# Altium PCB PCB_Project_SFS_V3.PcbDoc
Units mm, origin at the board's own origin, x right, y up, seen from the top; angles counter-clockwise.
Board outline 13.5 x 13.5 mm, 6 copper layers (Top Layer, Mid-Layer 1, Ground Plane, Power Plane, Mid-Layer 2, Bottom Layer), stack 0.761 mm thick; 40 components, 67 nets, 179 pads, 48 vias.
Unrouted connection lines stored in the file: 1.
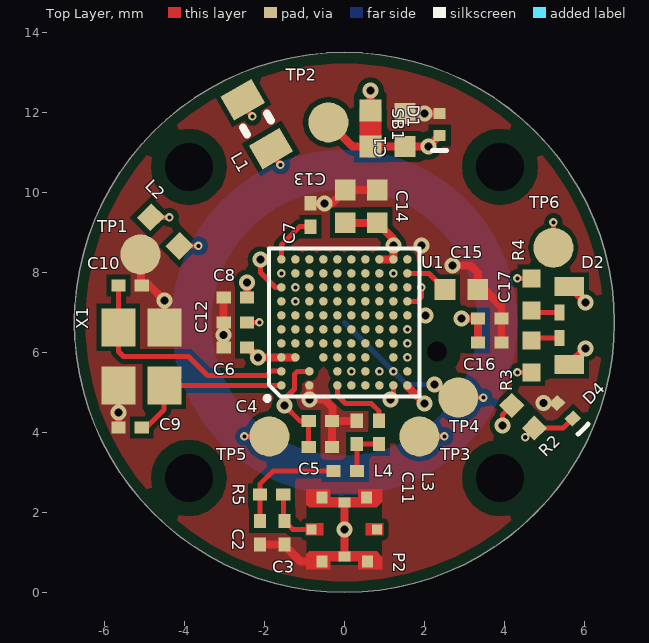
[diagram p0: Top Layer view]
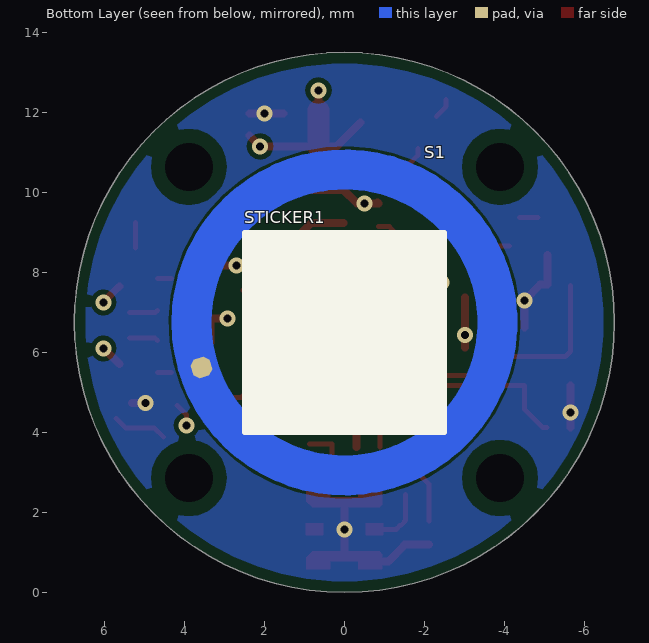
[diagram p1: Bottom Layer view, seen from below]
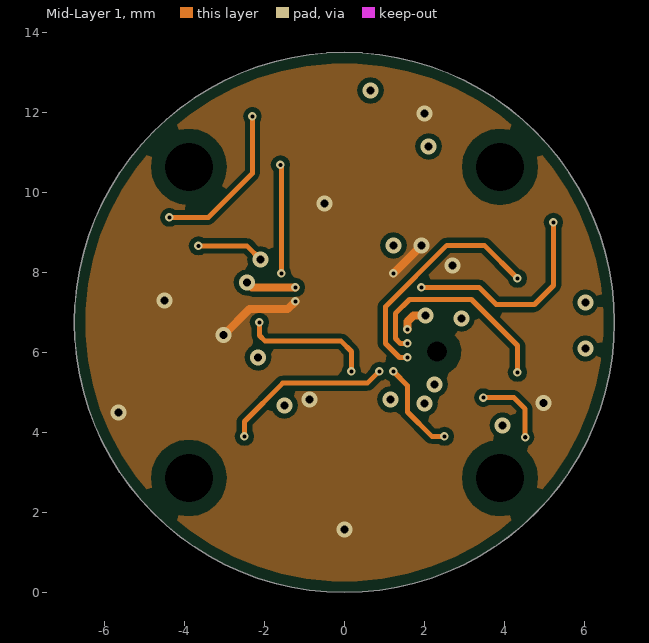
[diagram p2: Mid-Layer 1]
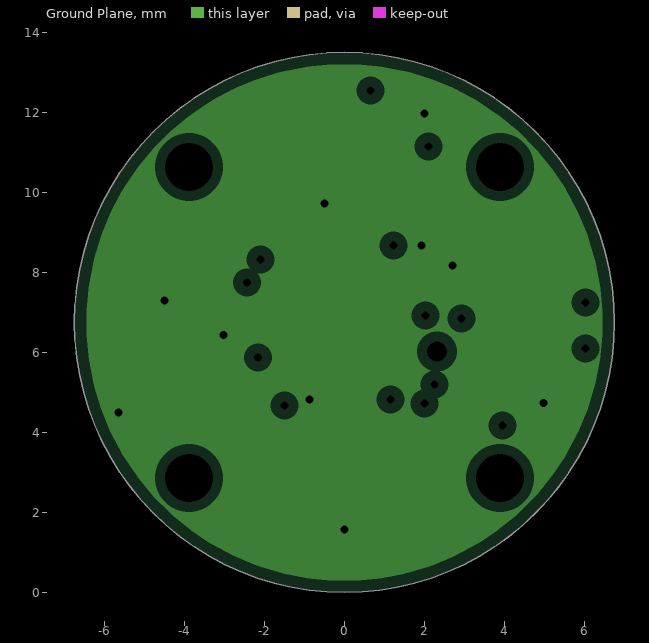
[diagram p3: Ground Plane, clearances drawn from the general rule]
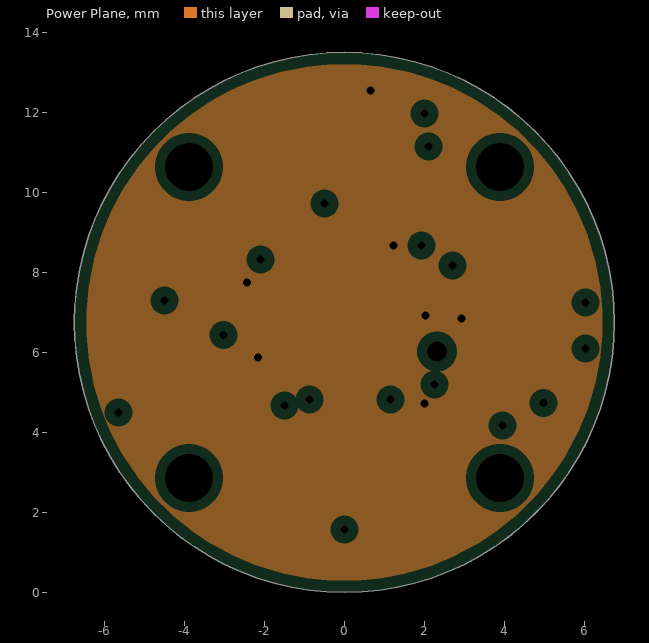
[diagram p4: Power Plane, clearances drawn from the general rule]
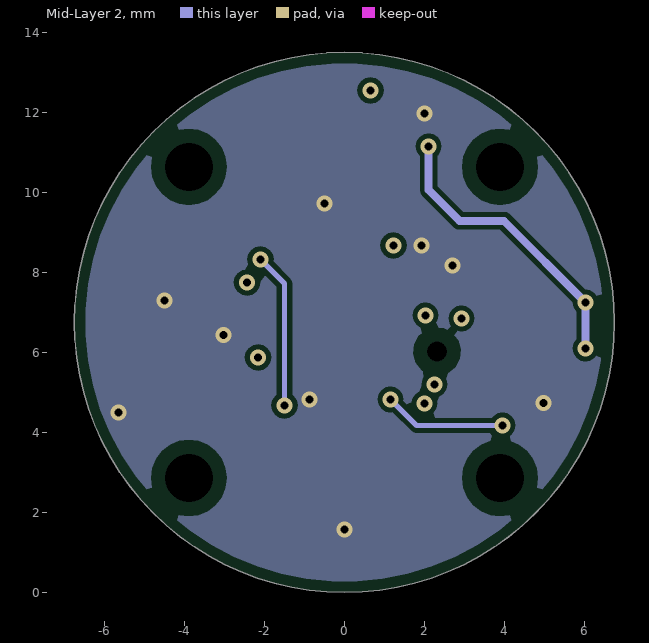
[diagram p5: Mid-Layer 2]
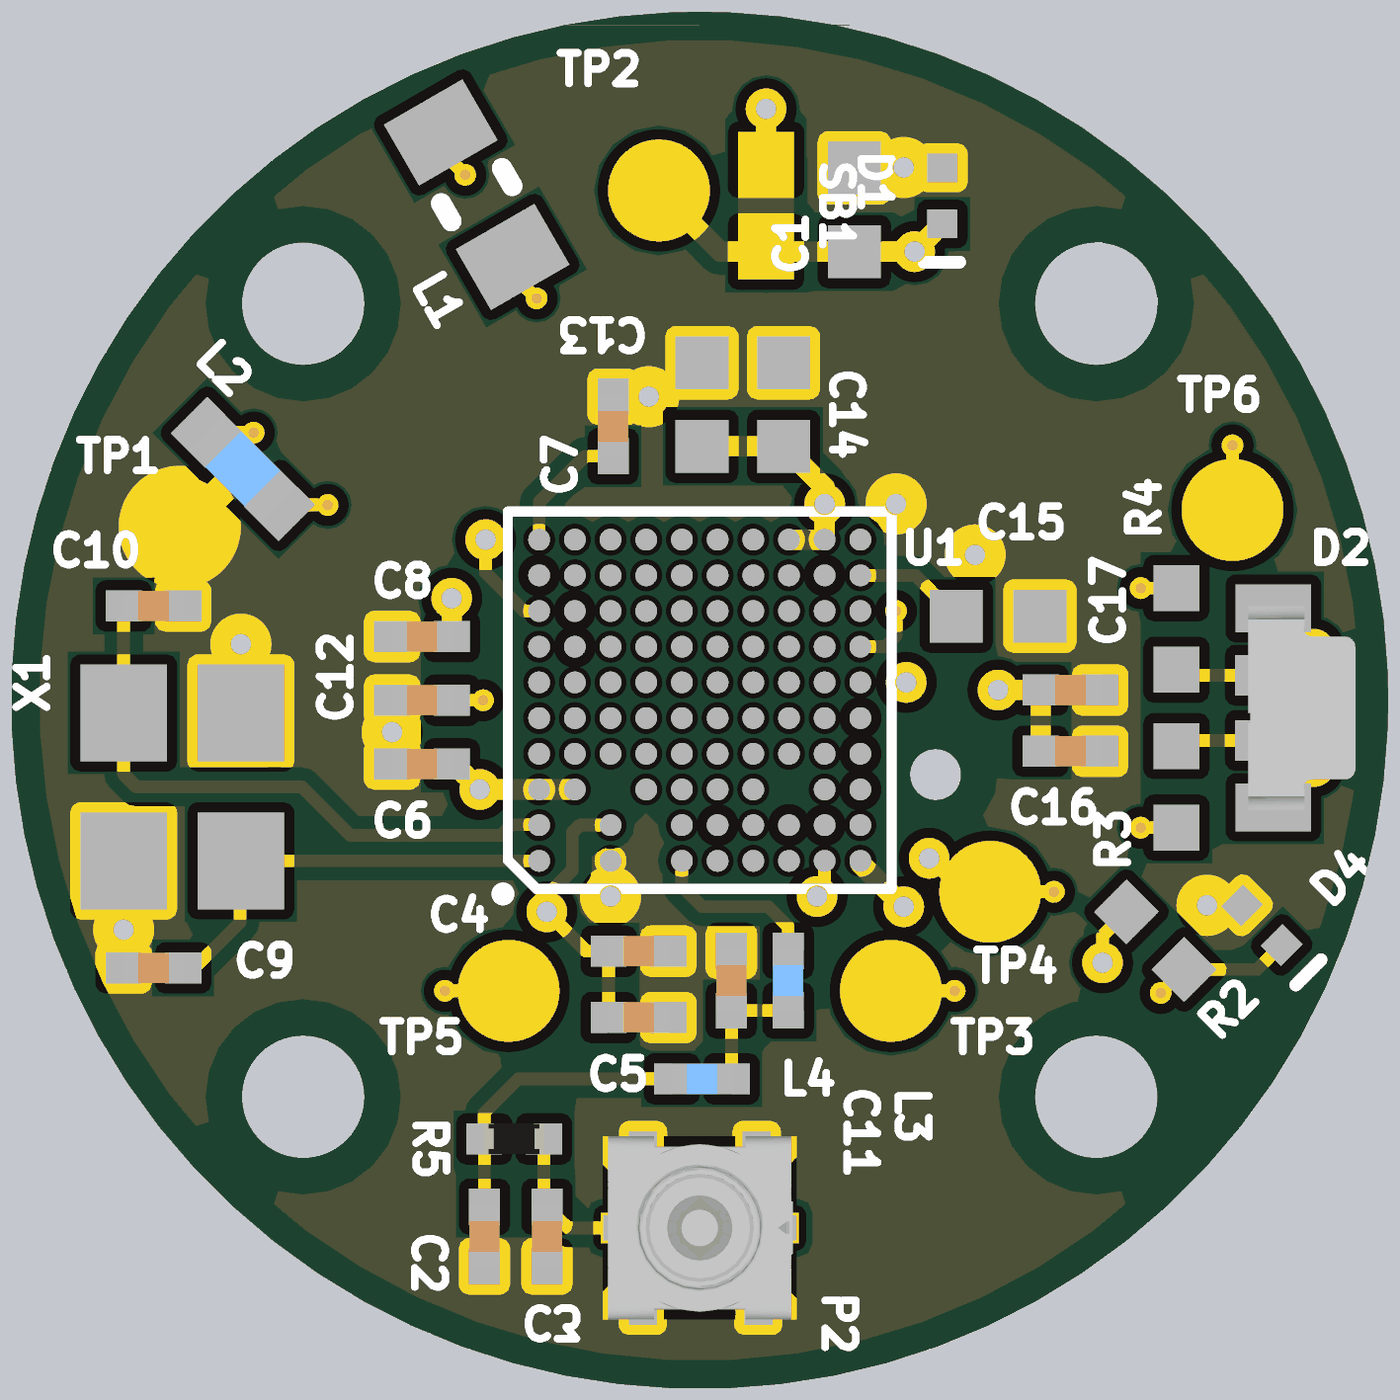
[diagram p6: 3D render of the assembled board from above, using the file's embedded part models]

## Layer stack, top to bottom
Top Solder: solder mask 0.025, Solder Resist, Dk 3.4
Top Layer: signal copper 0.043
Dielectric4: prepreg 0.076, PREPREG 1080, Dk 3.8
Mid-Layer 1: signal copper 0.015
Dielectric1: core 0.1, 0.004" H/H oz CORE, Dk 4.12
Ground Plane: plane copper 0.035, net GND
Dielectric2: prepreg 0.223, PREPREG 7628, Dk 4.3
Power Plane: plane copper 0.035, net VDD_NRF
Dielectric3: core 0.1, 0.004" H/H oz CORE, Dk 4.12
Mid-Layer 2: signal copper 0.015
Dielectric5: prepreg 0.076, PREPREG 1080, Dk 4.12
Bottom Layer: signal copper 0.043
Bottom Solder: solder mask 0.025, Solder Resist, Dk 3.4

## Board outline
0,0 cw(c0,6.75) -6.75,6.75 cw(c0,6.75) 0,13.5 cw(c0,6.75) 6.75,6.75 cw(c0,6.75)
cut-out: -1.277,13.379

## Design rules (kind name [scope] priority, off if disabled: settings)
BoardOutlineClearance [All] p1: gap=0.25 ignorepadtopadclearanceinfootprint=FALSE except(0: Arc-SplitContinuation Track-SplitContinuation SMDPad-SplitContinuation THPad-SplitContinuation Via-SplitContinuation Fill-SplitContinuation Poly-SplitContinuation Region-SplitContinuation Text-SplitContinuation)
Clearance NPTHClearance [IsThruPin and not PadIsPlated] p1: gap=0.35 ignorepadtopadclearanceinfootprint=FALSE except(0: Arc-Hole Track-Hole SMDPad-Hole THPad-Hole Via-Hole Fill-Hole Poly-Hole Region-Hole Text-Hole)
Clearance LowClearance [All] p2 off: gap=0.1 ignorepadtopadclearanceinfootprint=FALSE except(0: Arc-Hole Track-Hole SMDPad-Hole THPad-Hole Via-Hole Fill-Hole Poly-Hole Region-Hole Text-Hole)
Clearance StandardClearance [All] p3: gap=0.125 ignorepadtopadclearanceinfootprint=FALSE except(0: Arc-Hole Track-Hole SMDPad-Hole THPad-Hole Via-Hole Fill-Hole Poly-Hole Region-Hole Text-Hole)
Clearance HighClearance [All] p4 off: gap=0.25 ignorepadtopadclearanceinfootprint=FALSE except(0: Arc-Hole Track-Hole SMDPad-Hole THPad-Hole Via-Hole Fill-Hole Poly-Hole Region-Hole Text-Hole)
ComponentClearance [All] p1: gap=0 collisioncheckmode=3 verticalgap=2540 showdistances=TRUE
DiffPairsRouting [All] p1: maxlimit=1 minlimit=0.1 mostfreqgap=0.254 toplayer_prefgap=0.125 toplayer_minwidth=0.1 toplayer_maxwidth=1 toplayer_prefwidth=0.125 midlayer3_mingap=0.254 midlayer3_maxgap=0.254 midlayer3_minwidth=0.381 midlayer3_maxwidth=0.381 midlayer3_prefwidth=0.381 midlayer4_mingap=0.254 midlayer4_maxgap=0.254 midlayer4_minwidth=0.381 midlayer4_maxwidth=0.381 midlayer4_prefwidth=0.381 bottomlayer_prefgap=0.125 bottomlayer_minwidth=0.1 bottomlayer_maxwidth=1 bottomlayer_prefwidth=0.125 maxuncoupledlength=12.7
HoleSize HoleSize-0.8mmBoard [All] p1 off: absolutevalues=TRUE maxlimit=10 minlimit=0.15 maxpercent=80.000 minpercent=20.000 // For Board Thickness <= 0.8mm, Aspect Ratio <= 6
HoleSize HoleSize-LaserDrill [All] p2 off: absolutevalues=TRUE maxlimit=10 minlimit=0.15 maxpercent=80.000 minpercent=20.000 // Minimum Hole Size for Laser Drill
HoleSize HoleSize-ConventionalDrill [All] p3: absolutevalues=TRUE maxlimit=10 minlimit=0.175 maxpercent=80.000 minpercent=20.000 // Minimum Hole Size for Conventional Drill
HoleSize HoleSize-1.5mmBoard [All] p4: absolutevalues=TRUE maxlimit=10 minlimit=0.25 maxpercent=80.000 minpercent=20.000 // For Board Thickness <= 1.5mm, Aspect Ratio <= 6
HoleToHoleClearance [All] p1: gap=0.25 allowstackedmicrovias=TRUE
MinimumAnnularRing [All] p1: minimumring=0.1
MinimumSolderMaskSliver [All] p1: minsoldermaskwidth=0.2
PlaneClearance [All] p1: clearance=0.25
PlaneConnect [All] p1: planeconnectstyle=Direct reliefexpansion=0.508 reliefentries=4 reliefconductorwidth=0.254 reliefairgap=0.254
PolygonConnect [All] p1: connectstyle=Direct reliefconductorwidth=0.254 reliefentries=4 polygonreliefangle="90 Angle" airgapwidth=0.254
RoomDefinition IDF_Placement_Keepout_3 [OntopLayer] p1: confinementstyle=ConfineOut formatcopy=TRUE lockcomponents=FALSE outline -3.231,12.236 -3.432,12.523 -3.472,12.58 -3.574,12.677 -3.693,12.752 -3.824,12.801 -3.963,12.823 -4.104,12.818 -4.24,12.784 -4.367,12.724 -4.424,12.682 -4.638,12.522 -5.043,12.172 -5.422,11.793 -5.772,11.388 -5.932,11.174 -5.974,11.117 -6.034,10.99 -6.068,10.854 -6.073,10.713 -6.051,10.574 -6.002,10.443 -5.927,10.324 -5.83,10.222 -5.773,10.182 -5.486,9.981 -5.395,9.917 -5.181,9.852 -4.958,9.857 -4.747,9.931 -4.659,9.999 -3.6,8.94 -3.6,8 -2.1,8 -2.1,8.85 -1.25,8.85 -1.25,10.35 -2.19,10.35 -3.249,11.409 -3.181,11.497 -3.107,11.708 -3.102,11.931 -3.167,12.145 -3.231,12.236
RoomDefinition IDF_Placement_Keepout_2 [OnTopLayer] p2: confinementstyle=ConfineOut formatcopy=TRUE lockcomponents=FALSE outline -2.19,3.15 -3.249,2.091 -3.181,2.003 -3.107,1.792 -3.102,1.569 -3.167,1.355 -3.231,1.264 -3.432,0.977 -3.472,0.92 -3.574,0.823 -3.693,0.748 -3.824,0.699 -3.963,0.677 -4.104,0.682 -4.24,0.716 -4.367,0.776 -4.424,0.818 -4.638,0.978 -5.043,1.328 -5.422,1.707 -5.772,2.112 -5.932,2.326 -5.974,2.383 -6.034,2.51 -6.068,2.646 -6.073,2.787 -6.051,2.926 -6.002,3.057 -5.927,3.176 -5.83,3.278 -5.773,3.318 -5.486,3.519 -5.395,3.583 -5.181,3.648 -4.958,3.643 -4.747,3.569 -4.659,3.501 -3.6,4.56 -3.6,5.5 -2.1,5.5 -2.1,4.65 -1.25,4.65 -1.25,3.15
RoomDefinition IDF_Placement_Keepout_1 [OnTopLayer] p3: confinementstyle=ConfineOut formatcopy=TRUE lockcomponents=FALSE outline 2.19,10.35 3.249,11.409 3.181,11.497 3.107,11.708 3.102,11.931 3.167,12.145 3.231,12.236 3.432,12.523 3.472,12.58 3.574,12.677 3.693,12.752 3.824,12.801 3.963,12.823 4.104,12.818 4.24,12.784 4.367,12.724 4.424,12.682 4.638,12.522 5.043,12.172 5.422,11.793 5.772,11.388 5.932,11.174 5.974,11.117 6.034,10.99 6.068,10.854 6.073,10.713 6.051,10.574 6.002,10.443 5.927,10.324 5.83,10.222 5.773,10.182 5.486,9.981 5.395,9.917 5.181,9.852 4.958,9.857 4.747,9.931 4.659,9.999 3.6,8.94 3.6,8 2.1,8 2.1,8.85 1.25,8.85 1.25,10.35
RoomDefinition IDF_Placement_Keepout [OnTopLayer] p4: confinementstyle=ConfineOut formatcopy=TRUE lockcomponents=FALSE outline 3.231,1.264 3.432,0.977 3.472,0.92 3.574,0.823 3.693,0.748 3.824,0.699 3.963,0.677 4.104,0.682 4.24,0.716 4.367,0.776 4.424,0.818 4.638,0.978 5.043,1.328 5.422,1.707 5.772,2.112 5.932,2.326 5.974,2.383 6.034,2.51 6.068,2.646 6.073,2.787 6.051,2.926 6.002,3.057 5.927,3.176 5.83,3.278 5.773,3.318 5.486,3.519 5.395,3.583 5.181,3.648 4.958,3.643 4.747,3.569 4.659,3.501 3.6,4.56 3.6,5.5 2.1,5.5 2.1,4.65 1.25,4.65 1.25,3.15 2.19,3.15 3.249,2.091 3.181,2.003 3.107,1.792 3.102,1.569 3.167,1.355 3.231,1.264
RoutingVias [All] p1: holewidth=0.2 width=0.4 viastyle="Through Hole" minholewidth=0.1 minwidth=0.2 maxholewidth=1 maxwidth=2
SilkToSilkClearance [All] p1: silktosilkclearance=0.1
SilkToSolderMaskClearance [IsPad] p1: minsilkscreentomaskgap=0.3 clearancetoexposedcopper=TRUE
SolderMaskExpansion [All] p1: expansion=0.1
Width [All] p1: maxlimit=10 minlimit=0.1 preferedwidth=0.125 midlayer3_maxwidth=0.254 midlayer4_maxwidth=0.254 minimp=50.000000 maximp=50.000000 favimp=50.000000 checkconnectedcopper=TRUE
21 further rules are at their usual default settings.

## Classes and differential pairs
net class Power: GND VBATT VBATT_EXT VDD_NRF
net class 50ohm: NetC3_2 RF
component class U_proc_nrf52840_CIAA: C6 C7 C8 C9 C10 C11 C12 C13 C14 C15 C16 C17 L3 L4 SS U1 X1
component class PCB_Project_SFS: C1 C2 C3 D1 D2 D4 L1 L2 P2 R2 R3 R4 R5 S1 SB1 STICKER1 TP1 TP2 TP3 TP4 TP5 TP6

## Components (designator, comment, footprint, x,y, rotation, side; value= is the part's Value field where it differs from the comment)
C1 "capacitor-non-polar-fixed" C-IPCG-0402-H 1.515,11.56 r270 top value=10µF (schematic designator C21)
C2 "DNF" C-IPCG-0201-H -2.111,1.49 r90 top value=0F (schematic designator C22)
C3 "capacitor-non-polar-fixed" C-IPCG-0201-H -1.498,1.49 r90 top value=1.5pF (schematic designator C23)
C4 "" C-IPCG-0201-H -0.6,4.289 r180 top value=100nF (schematic designator C1)
C5 "LMK063BJ473KP-F" C-IPCG-0201-H -0.6,3.639 r180 top value=47nF (schematic designator C14)
C6 "" C-IPCG-0201-H -2.725,6.125 r0 top value=100nF (schematic designator C3)
C7 "" C-IPCG-0201-H -0.85,9.435 r270 top value=100nF (schematic designator C4)
C8 "" C-IPCG-0201-H -2.725,7.375 r0 top value=100nF (schematic designator C5)
C9 "" C-IPCG-0201-H -5.358,4.125 r0 top value=12pF (schematic designator C2)
C10 "" C-IPCG-0201-H -5.358,7.675 r180 top value=12pF (schematic designator C6)
C11 "" C-IPCG-0201-H 0.31,4 r270 top value=1pF (schematic designator C7)
C12 "" C-IPCG-0201-H -2.725,6.75 r0 top value=820pF (schematic designator C8)
C13 "" C-IPCG-0402-H 0.022,9.65 r270 top value=4.7µF (schematic designator C9)
C14 "" C-IPCG-0402-H 0.822,9.65 r270 top value=4.7µF (schematic designator C10)
C15 "" C-IPCG-0402-H 2.925,7.575 r180 top value=4.7µF (schematic designator C11)
C16 "" C-IPCG-0201-H 3.634,6.25 r180 top value=100nF (schematic designator C12)
C17 "" C-IPCG-0201-H 3.634,6.85 r180 top value=100nF (schematic designator C13)
D1 "TVS DIODE 3.3VWM 10VC 0201 (X3DFN2)" ONSEMI-X3DFN2 2.379,11.697 r90 top
D2 "EASV2010RGA0" EASV2010RGA0 5.625,6.675 r270 top
D4 "TVS DIODE 3.3VWM 10VC 0201 (X3DFN2)" ONSEMI-X3DFN2 5.513,4.544 r135 top
L1 "inductor-fixed" L-IPCG-0603-H -2.187,11.708 r300 top value=10µH (schematic designator L2)
L2 "inductor-fixed" L-IPCG-0402-H -4.48,9.02 r315 top value=15nH (schematic designator L3)
L3 "L-05B3N9SV6T" L-IPCG-0201-H 0.868,4 r270 top value=3.9nH (schematic designator L1)
L4 "L-05B4N7SV6T" L-IPCG-0201-H 0.02,3.036 r180 top value=4.7nH (schematic designator L2)
P2 "MS-180" "Hirose MS-180 Series Coaxial Connector" 0,1.575 r180 top (schematic designator P5)
R2 "resistor-fixed" R-IPCG-0402-H 4.468,4.393 r315 top value=360 (schematic designator R5)
R3 "resistor-fixed" R-IPCG-0402-H 4.675,5.9 r90 top value=360 (schematic designator R2)
R4 "resistor-fixed" R-IPCG-0402-H 4.675,7.45 r270 top value=360 (schematic designator R3)
R5 "resistor-fixed" R-IPCG-0201-H -1.821,2.448 r180 top value=0 (schematic designator R4)
S1 "900 gF V3" DOME_8MM_1LEG 0,6.75 r72.5 bottom (schematic designator S2)
SB1 "SB-NC" SB-NC-0402 0.65,11.6 r90 top net-tie
STICKER1 "ES 90-3015-048-000" STICKER-5_0x5_0mm 0,6.5 r90 bottom
TP1 "Testpoint" TESTPOINT_100#1 -5.1,8.45 r90 top
TP2 "Testpoint" TESTPOINT_100#2 -1.034,12.127 r270 top
TP3 "Testpoint" TESTPOINT_100#1 1.875,3.9 r0 top
TP4 "Testpoint" TESTPOINT_100#1 2.848,4.871 r0 top
TP5 "Testpoint" TESTPOINT_100#1 -1.875,3.9 r0 top
TP6 "Testpoint" TESTPOINT_100#1 5.225,8.616 r90 top
U1 "nRF52840-WLCSP" BGA94C35P10X10_354X360X50 0,6.75 r90 top
X1 "32MHz" XTAL_2016 -5.075,5.9 r270 top

## Footprints (in the part's own frame and the unit in brackets; to place one, negate y for a bottom-side part, rotate by r counter-clockwise, add the part's x,y. Pads: shape width x height; smd on the part's side, far side on the other; paste and mask are expansions set on the pad)
BGA94C35P10X10_354X360X50 [mm] "nRF52840 WLCSP 3.5x3.6mm 0.35mm Pitch 94 pin NSMD Pads"
  round 0.214 smd mask+0.05: A1(-1.575,1.575) A2(-1.225,1.575) A3(-0.875,1.575) A4(-0.525,1.575) A5(-0.175,1.575) A6(0.175,1.575) A7(0.525,1.575) A8(0.875,1.575) A9(1.225,1.575) A10(1.575,1.575) B3(-0.875,1.225) B4(-0.525,1.225) B5(-0.175,1.225) B6(0.175,1.225) B7(0.525,1.225) B8(0.875,1.225) B9(1.225,1.225) B10(1.575,1.225) C1(-1.575,0.875) C2(-1.225,0.875) C4(-0.525,0.875) C5(-0.175,0.875) C6(0.175,0.875) C7(0.525,0.875) C8(0.875,0.875) C9(1.225,0.875) C10(1.575,0.875) D3(-0.875,0.525) D4(-0.525,0.525) D5(-0.175,0.525) D6(0.175,0.525) D7(0.525,0.525) D8(0.875,0.525) D9(1.225,0.525) D10(1.575,0.525) E1(-1.575,0.175) E2(-1.225,0.175) E3(-0.875,0.175) E4(-0.525,0.175) E5(-0.175,0.175) E6(0.175,0.175) E7(0.525,0.175) E8(0.875,0.175) E9(1.225,0.175) E10(1.575,0.175) F1(-1.575,-0.175) F2(-1.225,-0.175) F3(-0.875,-0.175) F4(-0.525,-0.175) F5(-0.175,-0.175) F6(0.175,-0.175) F7(0.525,-0.175) F8(0.875,-0.175) F9(1.225,-0.175) F10(1.575,-0.175) G1(-1.575,-0.525) G2(-1.225,-0.525) G3(-0.875,-0.525) G4(-0.525,-0.525) G5(-0.175,-0.525) G6(0.175,-0.525) G7(0.525,-0.525) G8(0.875,-0.525) G9(1.225,-0.525) G10(1.575,-0.525) H1(-1.575,-0.875) H2(-1.225,-0.875) H4(-0.525,-0.875) H5(-0.175,-0.875) H6(0.175,-0.875) H7(0.525,-0.875) H8(0.875,-0.875) H9(1.225,-0.875) H10(1.575,-0.875) J1(-1.575,-1.225) J2(-1.225,-1.225) J3(-0.875,-1.225) J4(-0.525,-1.225) J5(-0.175,-1.225) J6(0.175,-1.225) J7(0.525,-1.225) J8(0.875,-1.225) J9(1.225,-1.225) J10(1.575,-1.225) K1(-1.575,-1.575) K2(-1.225,-1.575) K3(-0.875,-1.575) K4(-0.525,-1.575) K5(-0.175,-1.575) K6(0.175,-1.575) K7(0.525,-1.575) K8(0.875,-1.575) K9(1.225,-1.575) K10(1.575,-1.575)
  silkscreen extent -1.95,-1.88 1.85,1.98, body extent -1.77,-1.8 1.77,1.8, height 0.25
C-IPCG-0201-H [mil] "Chip Capacitor, 2-Leads, Body 0.60x0.30mm, IPC High Density"
  rect 14x12 smd: 1(-11.5,0) 2(11.5,0)
  body extent -12,-6 12,6, height 13
C-IPCG-0402-H [mm] "Chip Capacitor, 2-Leads, Body 1.00x0.50mm, IPC High Density"
  rect 0.52x0.52 smd: 1(-0.41,0) 2(0.41,0)
  body extent -0.53,-0.28 0.53,0.28, height 0.7
DOME_8MM_1LEG [mm] "One-legged 8mm Snap Dome Segmented"
  oct 0.5x0.5 smd paste-20: 1(0,3.75)
  round 3.4 smd paste-20 mask+0.25: 2(0,0)
  round 0 hole 0.5 unplated: MTG(0,2.425)
  Top Layer circle w1: c0,0 r3.825
  Top Layer pour cut-out: 0,-4.4 -1.684,-4.065 -3.111,-3.111 -4.065,-1.684 -4.4,0 -4.4,0 -3.811,2.2 -2.2,3.81 0,4.4 0,4.4 1.684,4.065 3.111,3.111 4.065,1.684 4.4,0 4.4,0 4.065,-1.684 3.111,-3.111 1.684,-4.065 0,-4.4
  Top Layer region: -3.8,1.383
  Top Layer region: -4.4,1.601
  body extent -6.28,-6.28 6.28,6.28, height 0.01
EASV2010RGA0 [mm] "2.1x1.0x0.62mm, 4 Pin, RG LED, Right Angle"
  rect 0.47x0.74 smd: 1(-0.975,0) 3(0.975,0)
  rect 0.4x0.25 smd: 2(-0.32,-0.25) 4(0.32,-0.25)
  body extent -1,-0.25 1,0.8, height 0.6
"Hirose MS-180 Series Coaxial Connector" [mm] "SMT RF Coaxial Connector, 4 conductors, 0.85mm height"
  rect 0.275x0.3 smd paste+0 mask+0.1: 1(-0.575,0.8) 1(-0.557,-0.8) 1(0.557,-0.8) 1(0.557,0.8)
  rect 0.3x0.25 smd paste+0 mask+0.1: 1(0,0.675) 1(0,-0.675)
  rect 0.25x0.25 smd paste+0 mask+0.1: 2(-0.82,0) 3(0.82,0)
  Top Layer region: 0.97,0.15 0.53,0.15 0.53,-0.15 0.97,-0.15
  Top Layer region: -0.95,-1 -0.35,-1 -0.35,-0.8 0.35,-0.8 0.35,-1 0.95,-1 0.95,-0.621 0.879,-0.55 -0.809,-0.55 -0.95,-0.691
  Top Layer region: -0.95,1 -0.35,1 -0.35,0.8 0.35,0.8 0.35,1 0.95,1 0.95,0.621 0.879,0.55 -0.809,0.55 -0.95,0.691
  Top Layer region: 0,-1.375
  Top Layer region: 0.45,-1.6
  Top Layer region: -0.97,0.15 -0.53,0.15 -0.53,-0.15 -0.97,-0.15
  Top Layer pour cut-out: -0.95,0.9 0.95,0.9 0.95,-0.9 -0.95,-0.9
  body extent -0.91,-0.9 0.9,0.9, height 0.85
L-IPCG-0201-H [mil] "Chip Inductor, 2-Leads, Body 0.60x0.30mm, IPC High Density"
  rect 14x12 smd: 1(-11.5,0) 2(11.5,0)
  body extent -12,-6 12,6, height 12
L-IPCG-0402-H [mil] "Chip Inductor, 2-Leads, Body 1.00x0.50mm, IPC High Density"
  rect 19x20 smd: 1(-20,0) 2(20,0)
  body extent -20,-10 20,10, height 20
L-IPCG-0603-H [mm] "Chip Inductor, 2-Leads, Body 1.60x0.85mm, IPC High Density"
  rect 0.69x0.89 smd: 1(-0.705,0) 2(0.705,0)
  silkscreen extent -0.1,-0.35 0.1,0.35, body extent -0.88,-0.48 0.87,0.48, height 1
ONSEMI-X3DFN2 [mm]
  rect 0.28x0.3 smd: 1(-0.275,0) 2(0.275,0)
  silkscreen extent -0.65,-0.17 -0.65,0.18, body extent -0.34,-0.17 0.34,0.18, height 0.3
R-IPCG-0201-H [mil] "Chip Resistor, 2-Leads, Body 0.60x0.30mm, IPC High Density"
  rect 14x12 smd: 1(-11.5,0) 2(11.5,0)
  body extent -12,-6 12,6, height 9
R-IPCG-0402-H [mm] "Chip Resistor, 2-Leads, Body 1.00x0.50mm, IPC High Density"
  rect 0.45x0.45 smd: 1(-0.4,0) 2(0.4,0)
  body extent -0.53,-0.27 0.53,0.28, height 0.4
SB-NC-0402 [mm] "Solder Bridge, Normally Closed (Shorted), 0402 Size"
  rect 0.55x0.55 smd paste-1: 1(-0.45,0) 2(0.45,0)
  Top Layer lines w0.55: -0.45,0 0.45,0
STICKER-5_0x5_0mm [mm] "Sticker 5.0x5.0mm"
  silkscreen extent -2.54,-2.54 2.54,2.54
TESTPOINT_100#1 [mm] "Testpoint 1mm diameter"
  round 1 smd paste-1: 1(0,0)
  body extent -0.5,-0.5 0.5,0.5, height 0.05
TESTPOINT_100#2 [mm] "Testpoint 1mm diameter"
  round 1 smd paste-1: 1(0.377,0.634)
  body extent -0.5,-0.5 0.5,0.5, height 0.05
XTAL_2016 [mm]
  rect 0.95x0.85 smd: 1(-0.725,-0.575) 2(0.725,-0.575) 3(0.725,0.575) 4(-0.725,0.575)
  body extent -1,-0.8 1,0.8, height 0.6

## Part data
C1: library part CMP-C00021,2, "CAP CER 10UF 6.3V 20% X5R 0402", Package="0402 (1005 Metric)", Temperature Coefficient=X5R, Tolerance=20%, Voltage Rating=6.3V, Height=0m
C2: library part CMP-C00037,6, "0201 Do-Not-Fit Capacitor", Package="0201 (0603 Metric)", Temperature Coefficient=NA, Tolerance=0%, Voltage Rating=0V, Height=0m
C3: library part CMP-C00043,4, "CAP CER 1.5PF 25V NP0 0201", Package="0201 (0603 Metric)", Temperature Coefficient=NP0, Tolerance=2%, Voltage Rating=25V, Height=0m
C4 C6 C7 C8 C16 C17: library part CMP-C00003,6, "CAP CER 0.1UF 25V X5R 0201", Package="0201 (0603 Metric)", Temperature Coefficient=X5R, Tolerance=10%, Voltage Rating=25V, Height=0mm
C5: library part CMP-C00069,1, "CAP CER 0.047UF 10V X5R 0201", Capacitance=47nF, Case/Package=0201, Case Code (Metric)=0603, Dielectric=X5R, Max Operating Temperature=85°C, Min Operating Temperature=-55°C, Package="0201 (0603 Metric)", Package Quantity=1, Tolerance=10%, Voltage=10V, Case Code (Imperial)=0201, Composition=Ceramic, Depth=0.3mm, Halogen Free="Halogen Free", Height=300µm, Lead Free="Lead Free", Length=0.6mm, Mount="Surface Mount", Number of Pins=2, Packaging="Tape and Reel", Radiation Hardening=No, REACH SVHC=Unknown, Temperature Coefficient=X5R, Termination=SMD/SMT, Thickness=0.013inch, Voltage Rating=10V, Voltage Rating (DC)=10V, Width=0.012inch
C9 C10: library part CMP-C00009,6, "CAP CER 12PF 25V 5% NP0 0201", Package="0201 (0603 Metric)", Temperature Coefficient=NP0, Tolerance=5%, Voltage Rating=25V, Height=0mm
C11: library part CMP-C00039,7, "CAP CER 1.0PF 25V NP0 0201", Package="0201 (0603 Metric)", Temperature Coefficient=NP0, Tolerance=5%, Voltage Rating=25V, Height=330µm
C12: library part CMP-C00066,1, "CAP CER 820PF 25V C0G/NP0 0201", Package="0201 (0603 Metric)", Temperature Coefficient=NP0, Tolerance=5%, Voltage Rating=25V, Height=0mm
C13 C14 C15: library part CMP-C00027,1, "CAP CER 4.7UF 6.3V 20% X5R 0402", Package="0402 (1005 Metric)", Temperature Coefficient=X5R, Tolerance=20%, Voltage Rating=6.3V, Height=0mm
D1 D4: library part CMP-D00009,2, Breakdown Voltage Min=5V, Clamping Voltage Max=10V, Current Peak Pulse=3A, Package=X3DFN2, Power Max=250mW, Reverse Standoff Voltage=3.3V, Type=Unidirectional
D2: library part CMP-D00016,2, "2.1x1.0x0.62mm, 4 Pin, RG LED, Right Angle", Color=R/G, Forward Voltage (Typ)=2.35V, Package=2010, Mounting="Right Angle", Wavelength=617.5-633.5/567.5-577.5nm
L1: library part CMP-L00004,1, "FIXED IND 10UH 50MA 900 MOHM SMD", Current Rating=50mA, DC Resistance=1.17, Package="0603 (1608 Metric)", Self Resonant Frequency=30MHz, Tolerance=20%, Height=900µm, Saturation Current=50mA
L2: library part CMP-L00001,5, "FIXED IND 15NH 320MA 460 MOHM", Current Rating=3.2dA, DC Resistance=4.6d, Package="0402 (1005 Metric)", Self Resonant Frequency=2.3GHz, Tolerance=5%
L3: library part CMP-L00000,5, "FIXED IND 3.9NH 300MA 450 MOHM", Current Rating=300mA, DC Resistance=0.45, Package="0201 (0603 Metric)", Self Resonant Frequency=6.8GHz, Tolerance=77%
L4: library part CMP-L00017,1, "FIXED IND 4.7NH 300MA 500 MOHM", Current Rating=300mA, DC Resistance=0.5, Package="0201 (0603 Metric)", Self Resonant Frequency=6GHz, Tolerance=6.8%
P2: library part CMP-P00052,4, "RF Subminiature Coaxial Switch - 0.85mm High, DC to 11GHz", Case/Package=SMD/SMT, Insulation Resistance=1GR, Max Frequency=11GHz, Max Operating Temperature=85°C, Min Operating Temperature=-40°C, Package Quantity=15000, Body Material=Brass, Body Plating=Gold, Connector Type=SMD/SMT, Contact Material=Copper, Contact Plating=Gold, Gender=Male, Mounting Type=SMT, Orientation=Vertical, Packaging="Tape and Reel", Pin Pitch=".3mm ???", Plating=Gold, Polarity=Standard, Position Number=3, Termination=Solder
R2 R3 R4: library part CMP-R00040,2, "RES SMD 360 OHM 1% 1/16W 0402", Package="0402 (1005 Metric)", Power Rating=100mW, Tolerance=1%
R5: library part CMP-R00000,8, "RES 0.0 OHM 1/20W 0201 SMD", Package="0201 (0603 Metric)", Power Rating=50mW, Tolerance=0%
S1: library part CMP-S00018,14, "One-legged Snap Dome Switch 8mm", Contact Rating=50mA, Circuit=SPST, Positions=1, Type=NO
SB1: library part CMP-M00008,7, "Solder Bridge, Normally Closed (Shorted)"
STICKER1: library part CMP-M00004,3, "Sticker for PCB IDs"
TP1 TP2 TP3 TP4 TP5 TP6: library part CMP-M00002,5, "Exposed pad for testpoint"
U1: library part CMP-U00040,9, "Multi-protocol Bluetooth Low Energy, IEEE 802.15.4, ANT and 2.4GHz proprietary system-on-chip WLCSP", Package=WLCSP, Function=Processor, Size="3.54mm x 3.604mm"
X1: library part CMP-X00001,6, "32MHz, ±20ppm(max), 8pF, 60 Ohm, Surface Mount 4-SMD, No Lead (DFN, LCC)", Frequency Stability (ppm)=50, Frequency Tolerance (ppm)=20, Load Capacitance=8pF, Frequency=32MHz

## Free pads (board coordinates)
  round 0 hole 1.2 unplated: MTG(-3.889,2.861) MTG(-3.889,10.639) MTG(3.889,2.861) MTG(3.889,10.639)

## Via types
v1: diameter 0.4, hole 0.2, Top Layer to Bottom Layer, 25 vias
v2: diameter 0.214, hole 0.102, Top Layer to Mid-Layer 1, 23 vias

## Nets (pads, with @x,y where several pads share a name; then routed paths per layer and width w, separated by ;. In a path a pad name is that pad's centre, name@x,y a point inside that pad or via, vN(x,y) a via of type N, cw(c..) or ccw(c..) an arc to the next point about the centre after c; other vN are vias at no path point)
DEC1: C7.2 U1.A10 | length 1.3
  Top Layer w0.125: U1.A10 -1.575,8.692 -1.124,9.143 C7.2
DEC4_6: C4.2 C5.2 L2.2 U1.A8 U1.C2 | length 9.8
  Top Layer w0.125: L2.2@-4.121,8.665 v2(-3.65,8.665) ; v1(-2.1,8.325) -2.1,8 -1.725,7.625 U1.A8 ; C5.2 C4.2 -1.115,4.289 -1.5,4.674 -1.5,4.833 -1.25,5.084 -1.25,5.452 -1.177,5.525 U1.C2
  Mid-Layer 1 w0.125: v2(-3.65,8.665) -2.44,8.665 v1(-2.1,8.325)
  Mid-Layer 2 w0.125: v1(-2.1,8.325) -1.5,7.725 v1(-1.5,4.675)
GND: C1.1 C2.1 C3.1 C4.1 C5.1 C6.1 C7.1 C8.1 C9.1 C10.1 C11.1 C12.1 C13.1 C14.1 C15.1 C16.1 C17.1 D1.2 D4.2 P2.1 S1.1 TP1.1 U1.B7 U1.C1 U1.J9 X1.2 X1.4 | length 19.2
  Top Layer w0.125: TP1.1 TP1.1@-5.083,8.433 ; C3.1@-1.498,1.172 C3.1 ; P2.1@0.557,2.375 P2.1@0.557,2.387 ; D4.2@5.312,4.732 D4.2
  Top Layer w0.2: C9.1 v1(-5.65,4.5) X1.2 ; TP1.1@-5.083,8.433 -5.083,7.692 -4.892,7.692 v1(-4.5,7.3) X1.4 ; C6.1 v1(-3.017,6.438) C12.1 C8.1 ; C2.1 C3.1 ; C3.1@-1.498,1.172 -1.1,0.775 P2.1@-0.557,0.775 ; U1.C1 v1(-0.875,4.825) -0.875,4.817 -0.492,4.817 -0.303,4.629 C4.1@-0.303,4.293 ; C7.1@-0.827,9.75 C7.1 -0.311,9.727 C13.1 C14.1 ; C5.1 C4.1 ; C4.1 C11.1@0.308,4.29 ; P2.1@0,0.9 v1(0,1.575) P2.1@0,2.25 ; C1.1 D1.2 ; v1(2.7,8.175) 3.15,8.175 3.335,7.99 C15.1 3.501,7.575 3.927,7.149 C17.1 ; C16.1 C17.1 ; v1@4.975,4.732 D4.2@5.312,4.732
  Mid-Layer 1 w0.2: v1(-3.017,6.438) -2.373,7.082 -1.418,7.082 v2(-1.225,7.275) ; v2(1.225,7.975) v1(1.925,8.675)
  other v1: 4.975,4.739 -0.5,9.727 2,11.975
LED_G: R4.1 U1.K3 | length 6.2
  Top Layer w0.125: v2(4.325,7.85) R4.1
  Mid-Layer 1 w0.125: v2(1.575,5.875) 1.375,5.875 1.025,6.225 1.025,7.142 2.562,8.678 3.497,8.678 v2(4.325,7.85)
LED_R: R3.1 U1.K4 | length 5.7
  Top Layer w0.125: v2(4.325,5.5) R3.1
  Mid-Layer 1 w0.125: v2(1.575,6.225) 1.399,6.225 1.275,6.348 1.275,6.975 1.625,7.325 3.175,7.325 4.325,6.175 v2(4.325,5.5)
NetC3_2: C3.2 P2.3 R5.1 | length 1.5
  Top Layer w0.125: R5.1 -1.528,1.812 C3.2 -1.498,1.757 -1.408,1.667 -1.383,1.667 -1.291,1.575 P2.3
NetC11_2: C11.2 L3.2 L4.1 | length 1.2
  Top Layer w0.125: C11.2 L3.2 ; L4.1@0.311,3.036 C11.2
NetC12_2: C12.2 U1.F2 | length 3.6
  Top Layer w0.125: C12.2 v2(-2.125,6.75)
  Mid-Layer 1 w0.125: v2(-2.125,6.75) -2.125,6.425 -1.98,6.28 -0.08,6.28 0.175,6.025 v2(0.175,5.525)
NetC15_2: C15.2 U1.K9 | length 1.1
  Top Layer w0.125: U1.K9 2.115,7.975 C15.2@2.54,7.55
NetD2_2: D2.2 R4.2 | length 0.7
  Top Layer w0.125: R4.2 4.73,6.995 D2.2
NetD2_4: D2.4 R3.2 | length 0.7
  Top Layer w0.125: R3.2 4.73,6.355 D2.4
NetL1_1: L1.1 L2.1 | length 4.9
  Top Layer w0.125: L2.1@-4.839,9.377 v2@-4.375,9.377 ; L1.1 -2.54,12.143 v2(-2.3,11.903)
  Mid-Layer 1 w0.125: v2(-4.375,9.375) -3.403,9.375 -2.3,10.478 v2(-2.3,11.903)
NetL1_2: L1.2 U1.A9 | length 3.3
  Top Layer w0.125: L1.2 -1.835,10.926 v2(-1.6,10.691)
  Mid-Layer 1 w0.125: v2@-1.612,10.712 -1.575,10.675 v2(-1.575,7.975)
NetL3_1: L3.1 U1.E1 | length 1.7
  Top Layer w0.125: U1.E1 -0.175,4.925 0.025,4.725 0.674,4.725 0.868,4.531 L3.1
P0.00/XL1: U1.B9
P0.01/XL2: U1.B10
P0.02/AIN0: U1.B6
P0.03/AIN1: U1.A5
P0.04/AIN2: U1.C10
P0.05/AIN3: U1.D10
P0.06: U1.E9
P0.07: U1.F9
P0.08: U1.E10
P0.09/NFC1: U1.F1
P0.10/NFC2: U1.E2
P0.11: U1.H8
P0.12: U1.G10
P0.13: U1.H7
P0.14: U1.J7
P0.16: U1.H6
P0.17: U1.J6
P0.18/RESET: U1.K6
P0.20: U1.J5
P0.21: U1.J4
P0.23: U1.H5
P0.24: U1.H4
P0.25: U1.K2
P0.26: U1.C9
P0.27: U1.D9
P0.28/AIN4: U1.A6
P0.29/AIN5: U1.C7
P0.30/AIN6: U1.A7
P0.31/AIN7: U1.C8
P1.00: U1.J3
P1.02: U1.G3
P1.03: U1.F3
P1.04: U1.H1
P1.05: U1.G2
P1.06: U1.E3
P1.07: U1.G1
P1.08: U1.G9
P1.09: U1.F10
P1.10: U1.B4
P1.12: U1.C5
P1.13: U1.A4
P1.14: U1.B5
P1.15: U1.C6
RF: C2.2 L4.2 R5.2 | length 2.9
  Top Layer w0.125: R5.2 -2.113,2.706 -1.783,3.036 L4.2 ; R5.2 C2.2@-2.112,1.783 ; C2.2@-2.112,1.783 C2.2
SHIFT_BTN: R2.1 U1.J1 | length 4.1
  Top Layer w0.125: v1@1.146,4.821 1.225,4.9 U1.J1 ; v1(3.95,4.175) 3.95,4.441 R2.1
  Mid-Layer 2 w0.125: v1(1.15,4.825) 1.8,4.175 v1(3.95,4.175)
SHIFT_BTN_2: TP6.1 U1.K7 | length 6.5
  Top Layer w0.125: U1.K7@1.599,7.275 1.817,7.275 1.924,7.382 v2@1.924,7.625 ; TP6.1 v2(5.225,9.25)
  Mid-Layer 1 w0.125: v2(1.925,7.625) 3.368,7.625 3.793,7.2 4.75,7.2 5.225,7.675 v2(5.225,9.25)
SHIFT_BTN_EXT: D4.1 R2.2 S1.2 TP4.1 | length 7.5
  Top Layer w0.125: v1(2.25,5.2) 2.579,4.871 TP4.1 v2(3.473,4.871) ; v2(4.521,3.88) R2.2 5.468,4.11 D4.1
  Mid-Layer 1 w0.125: v2@3.475,4.871 4.234,4.871 4.521,4.585 v2(4.521,3.88)
  Bottom Layer w0.125: S1.2 1.55,5.2 v1(2.25,5.2)
SWDCLK: TP5.1 U1.H2 | length 4.9
  Top Layer w0.125: v2(-2.5,3.9) TP5.1
  Mid-Layer 1 w0.125: v2(-2.5,3.9) -2.5,4.273 -1.543,5.23 0.573,5.23 v2@0.871,5.529
  other v2: 0.875,5.525
SWDIO: TP3.1 U1.J2 | length 3
  Top Layer w0.125: TP3.1 v2(2.5,3.9)
  Mid-Layer 1 w0.125: v2@1.225,5.522 1.578,5.169 1.578,4.509 2.184,3.904 v2@2.496,3.904
  other v2: 1.225,5.525
VBATT: C1.2 D1.1 D2.1 D2.3 SB1.1 TP2.1 | length 11.7
  Top Layer w0.125: v1@6.025,6.026 v1@6.025,6.077
  Top Layer w0.2: TP2.1 0.2,11.15 SB1.1 C1.2 v1(2.107,11.15) D1.1 ; D2.3@5.625,5.711 v1@6.033,6.119 ; D2.1@5.627,7.652 v1@6.027,7.252
  Mid-Layer 2 w0.2: v1(2.107,11.15) 2.107,10.063 2.879,9.291 3.984,9.291 v1(6.025,7.25) v1(6.025,6.1)
VDD_NRF: C6.2 C8.2 C13.2 C14.2 C16.2 C17.2 SB1.2 U1.A3 U1.B3 U1.B8 U1.H10 U1.J10 U1.K1 U1.K5 | length 7.9
  Top Layer w0.125: C6.2 C6.2@-2.408,6.125
  Top Layer w0.2: C8.2 v1(-2.433,7.75) ; C6.2@-2.408,6.125 v1(-2.158,5.875) U1.A3 U1.B3 ; C13.2 C14.2 1.224,8.838 v1(1.225,8.675) ; SB1.2 v1(0.65,12.55) ; U1.H10 U1.J10 v1(1.225,8.675) ; U1.K1@1.575,5.163 1.575,5.15 v1(2,4.725) ; v1(2.925,6.85) C17.2 C16.2
  Mid-Layer 1 w0.2: v1(-2.433,7.75) -2.308,7.625 v2(-1.225,7.625) ; v2(1.575,6.575) 1.575,6.775 1.725,6.925 v1@1.925,6.925
  other v1: 2.025,6.925
XC1: C9.2 U1.A1 X1.3 | length 4.3
  Top Layer w0.125: C9.2 -4.958,4.125 -4.508,4.575 -4.508,5.167 X1.3 -1.925,5.175 U1.A1
XC2: C10.2 U1.A2 X1.1 | length 6
  Top Layer w0.125: C10.2 X1.1 -5.65,6.025 -5.525,5.9 -3.9,5.9 -3.425,5.425 -1.95,5.425 -1.845,5.53 -1.58,5.53 U1.A2
pads on no net: P2.2 S1.MTG U1.C4 U1.D3 U1.D4 U1.D5 U1.D6 U1.D7 U1.D8 U1.E4 U1.E5 U1.E6 U1.E7 U1.E8 U1.F4 U1.F5 U1.F6 U1.F7 U1.F8 U1.G4 U1.G5 U1.G6 U1.G7 U1.G8 U1.H9 U1.J8 U1.K8 U1.K10

## Polygon pours and split planes (outlines as drawn)
GND on Top Layer "Top Layer-GND" (solid, pour order 2): -5.555,3.42 -5.855,3.981 -6.098,4.568 -6.283,5.176 -6.407,5.8 -6.469,6.432 -6.469,7.068 -6.407,7.7 -6.283,8.324 -6.098,8.932 -5.855,9.519 -5.555,10.08 -5.202,10.608 -4.799,11.1 -4.35,11.549 -3.858,11.952 -3.33,12.305 -2.769,12.605 -2.182,12.848 -1.574,13.033 -0.95,13.157 -0.318,13.219 0.318,13.219 0.95,13.157 1.574,13.033 2.182,12.848 2.769,12.605 3.33,12.305 3.858,11.952 4.35,11.549 4.799,11.1 5.202,10.608 5.555,10.08 5.855,9.519 6.098,8.932 6.283,8.324 6.407,7.7 6.469,7.068 6.469,6.432 6.407,5.8 6.283,5.176 6.098,4.568 5.855,3.981 5.555,3.42 5.202,2.892 4.799,2.4 4.35,1.951 3.858,1.548 3.33,1.195 2.769,0.895 2.182,0.652 1.574,0.467 0.95,0.343 0.318,0.281 -0.318,0.281 -0.95,0.343 -1.574,0.467 -2.182,0.652 -2.769,0.895 -3.33,1.195 -3.858,1.548 -4.35,1.951 -4.799,2.4 -5.202,2.892
GND on Mid-Layer 1 "mid-Layer 1-GND" (solid, pour order 4): -5.555,3.42 -5.855,3.981 -6.098,4.568 -6.283,5.176 -6.407,5.8 -6.469,6.432 -6.469,7.068 -6.407,7.7 -6.283,8.324 -6.098,8.932 -5.855,9.519 -5.555,10.08 -5.202,10.608 -4.799,11.1 -4.35,11.549 -3.858,11.952 -3.33,12.305 -2.769,12.605 -2.182,12.848 -1.574,13.033 -0.95,13.157 -0.318,13.219 0.318,13.219 0.95,13.157 1.574,13.033 2.182,12.848 2.769,12.605 3.33,12.305 3.858,11.952 4.35,11.549 4.799,11.1 5.202,10.608 5.555,10.08 5.855,9.519 6.098,8.932 6.283,8.324 6.407,7.7 6.469,7.068 6.469,6.432 6.407,5.8 6.283,5.176 6.098,4.568 5.855,3.981 5.555,3.42 5.202,2.892 4.799,2.4 4.35,1.951 3.858,1.548 3.33,1.195 2.769,0.895 2.182,0.652 1.574,0.467 0.95,0.343 0.318,0.281 -0.318,0.281 -0.95,0.343 -1.574,0.467 -2.182,0.652 -2.769,0.895 -3.33,1.195 -3.858,1.548 -4.35,1.951 -4.799,2.4 -5.202,2.892
GND on Mid-Layer 2 "Mid-Layer 2-GND" (solid, pour order 6): -5.555,3.42 -5.855,3.981 -6.098,4.568 -6.283,5.176 -6.407,5.8 -6.469,6.432 -6.469,7.068 -6.407,7.7 -6.283,8.324 -6.098,8.932 -5.855,9.519 -5.555,10.08 -5.202,10.608 -4.799,11.1 -4.35,11.549 -3.858,11.952 -3.33,12.305 -2.769,12.605 -2.182,12.848 -1.574,13.033 -0.95,13.157 -0.318,13.219 0.318,13.219 0.95,13.157 1.574,13.033 2.182,12.848 2.769,12.605 3.33,12.305 3.858,11.952 4.35,11.549 4.799,11.1 5.202,10.608 5.555,10.08 5.855,9.519 6.098,8.932 6.283,8.324 6.407,7.7 6.469,7.068 6.469,6.432 6.407,5.8 6.283,5.176 6.098,4.568 5.855,3.981 5.555,3.42 5.202,2.892 4.799,2.4 4.35,1.951 3.858,1.548 3.33,1.195 2.769,0.895 2.182,0.652 1.574,0.467 0.95,0.343 0.318,0.281 -0.318,0.281 -0.95,0.343 -1.574,0.467 -2.182,0.652 -2.769,0.895 -3.33,1.195 -3.858,1.548 -4.35,1.951 -4.799,2.4 -5.202,2.892
GND on Bottom Layer "Bottom Layer-GND" (solid, pour order 8): -5.555,3.42 -5.855,3.981 -6.098,4.568 -6.283,5.176 -6.407,5.8 -6.469,6.432 -6.469,7.068 -6.407,7.7 -6.283,8.324 -6.098,8.932 -5.855,9.519 -5.555,10.08 -5.202,10.608 -4.799,11.1 -4.35,11.549 -3.858,11.952 -3.33,12.305 -2.769,12.605 -2.182,12.848 -1.574,13.033 -0.95,13.157 -0.318,13.219 0.318,13.219 0.95,13.157 1.574,13.033 2.182,12.848 2.769,12.605 3.33,12.305 3.858,11.952 4.35,11.549 4.799,11.1 5.202,10.608 5.555,10.08 5.855,9.519 6.098,8.932 6.283,8.324 6.407,7.7 6.469,7.068 6.469,6.432 6.407,5.8 6.283,5.176 6.098,4.568 5.855,3.981 5.555,3.42 5.202,2.892 4.799,2.4 4.35,1.951 3.858,1.548 3.33,1.195 2.769,0.895 2.182,0.652 1.574,0.467 0.95,0.343 0.318,0.281 -0.318,0.281 -0.95,0.343 -1.574,0.467 -2.182,0.652 -2.769,0.895 -3.33,1.195 -3.858,1.548 -4.35,1.951 -4.799,2.4 -5.202,2.892
GND on Ground Plane (split plane): 0.947,13.136 1.569,13.013 2.175,12.829 2.76,12.586 3.319,12.288 3.846,11.936 4.336,11.534 4.784,11.086 5.186,10.596 5.538,10.069 5.836,9.51 6.079,8.925 6.263,8.319 6.386,7.697 6.449,7.067 6.449,6.75 6.449,6.433 6.386,5.803 6.263,5.181 6.079,4.575 5.836,3.99 5.538,3.431 5.186,2.904 4.784,2.414 4.336,1.966 3.846,1.564 3.319,1.212 2.76,0.914 2.175,0.671 1.569,0.487 0.947,0.364 0.317,0.301 -0.317,0.301 -0.947,0.364 -1.569,0.487 -2.175,0.671 -2.76,0.914 -3.319,1.212 -3.846,1.564 -4.336,1.966 -4.784,2.414 -5.186,2.904 -5.538,3.431 -5.836,3.99 -6.079,4.575 -6.263,5.181 -6.386,5.803 -6.449,6.433 -6.449,6.75 -6.449,7.067 -6.386,7.697 -6.263,8.319 -6.079,8.925 -5.836,9.51 -5.538,10.069 -5.186,10.596 -4.784,11.086 -4.336,11.534 -3.846,11.936 -3.319,12.288 -2.76,12.586 -2.175,12.829 -1.569,13.013 -0.947,13.136 -0.317,13.199 0.317,13.199
VDD_NRF on Power Plane (split plane): 0.947,13.136 1.569,13.013 2.175,12.829 2.76,12.586 3.319,12.288 3.846,11.936 4.336,11.534 4.784,11.086 5.186,10.596 5.538,10.069 5.836,9.51 6.079,8.925 6.263,8.319 6.386,7.697 6.449,7.067 6.449,6.75 6.449,6.433 6.386,5.803 6.263,5.181 6.079,4.575 5.836,3.99 5.538,3.431 5.186,2.904 4.784,2.414 4.336,1.966 3.846,1.564 3.319,1.212 2.76,0.914 2.175,0.671 1.569,0.487 0.947,0.364 0.317,0.301 -0.317,0.301 -0.947,0.364 -1.569,0.487 -2.175,0.671 -2.76,0.914 -3.319,1.212 -3.846,1.564 -4.336,1.966 -4.784,2.414 -5.186,2.904 -5.538,3.431 -5.836,3.99 -6.079,4.575 -6.263,5.181 -6.386,5.803 -6.449,6.433 -6.449,6.75 -6.449,7.067 -6.386,7.697 -6.263,8.319 -6.079,8.925 -5.836,9.51 -5.538,10.069 -5.186,10.596 -4.784,11.086 -4.336,11.534 -3.846,11.936 -3.319,12.288 -2.76,12.586 -2.175,12.829 -1.569,13.013 -0.947,13.136 -0.317,13.199 0.317,13.199

## Silkscreen, mask and mechanical layers (free items; w line width, h text height)
Rigid Cutout:
  circle w0.1: c0,6.75 r6.75